# Altium PCB UTAT_data handling_v1_componentMap.PcbDoc (part 2 of 3)
Units mm, origin at the board's own origin, x right, y up, seen from the top; angles counter-clockwise.
Board outline 152.4 x 101.6 mm, 4 copper layers (Top Layer, +3V3, GND, Bottom Layer); 168 components, 207 nets, 753 pads, 464 vias.
Unrouted connection lines stored in the file: 1.
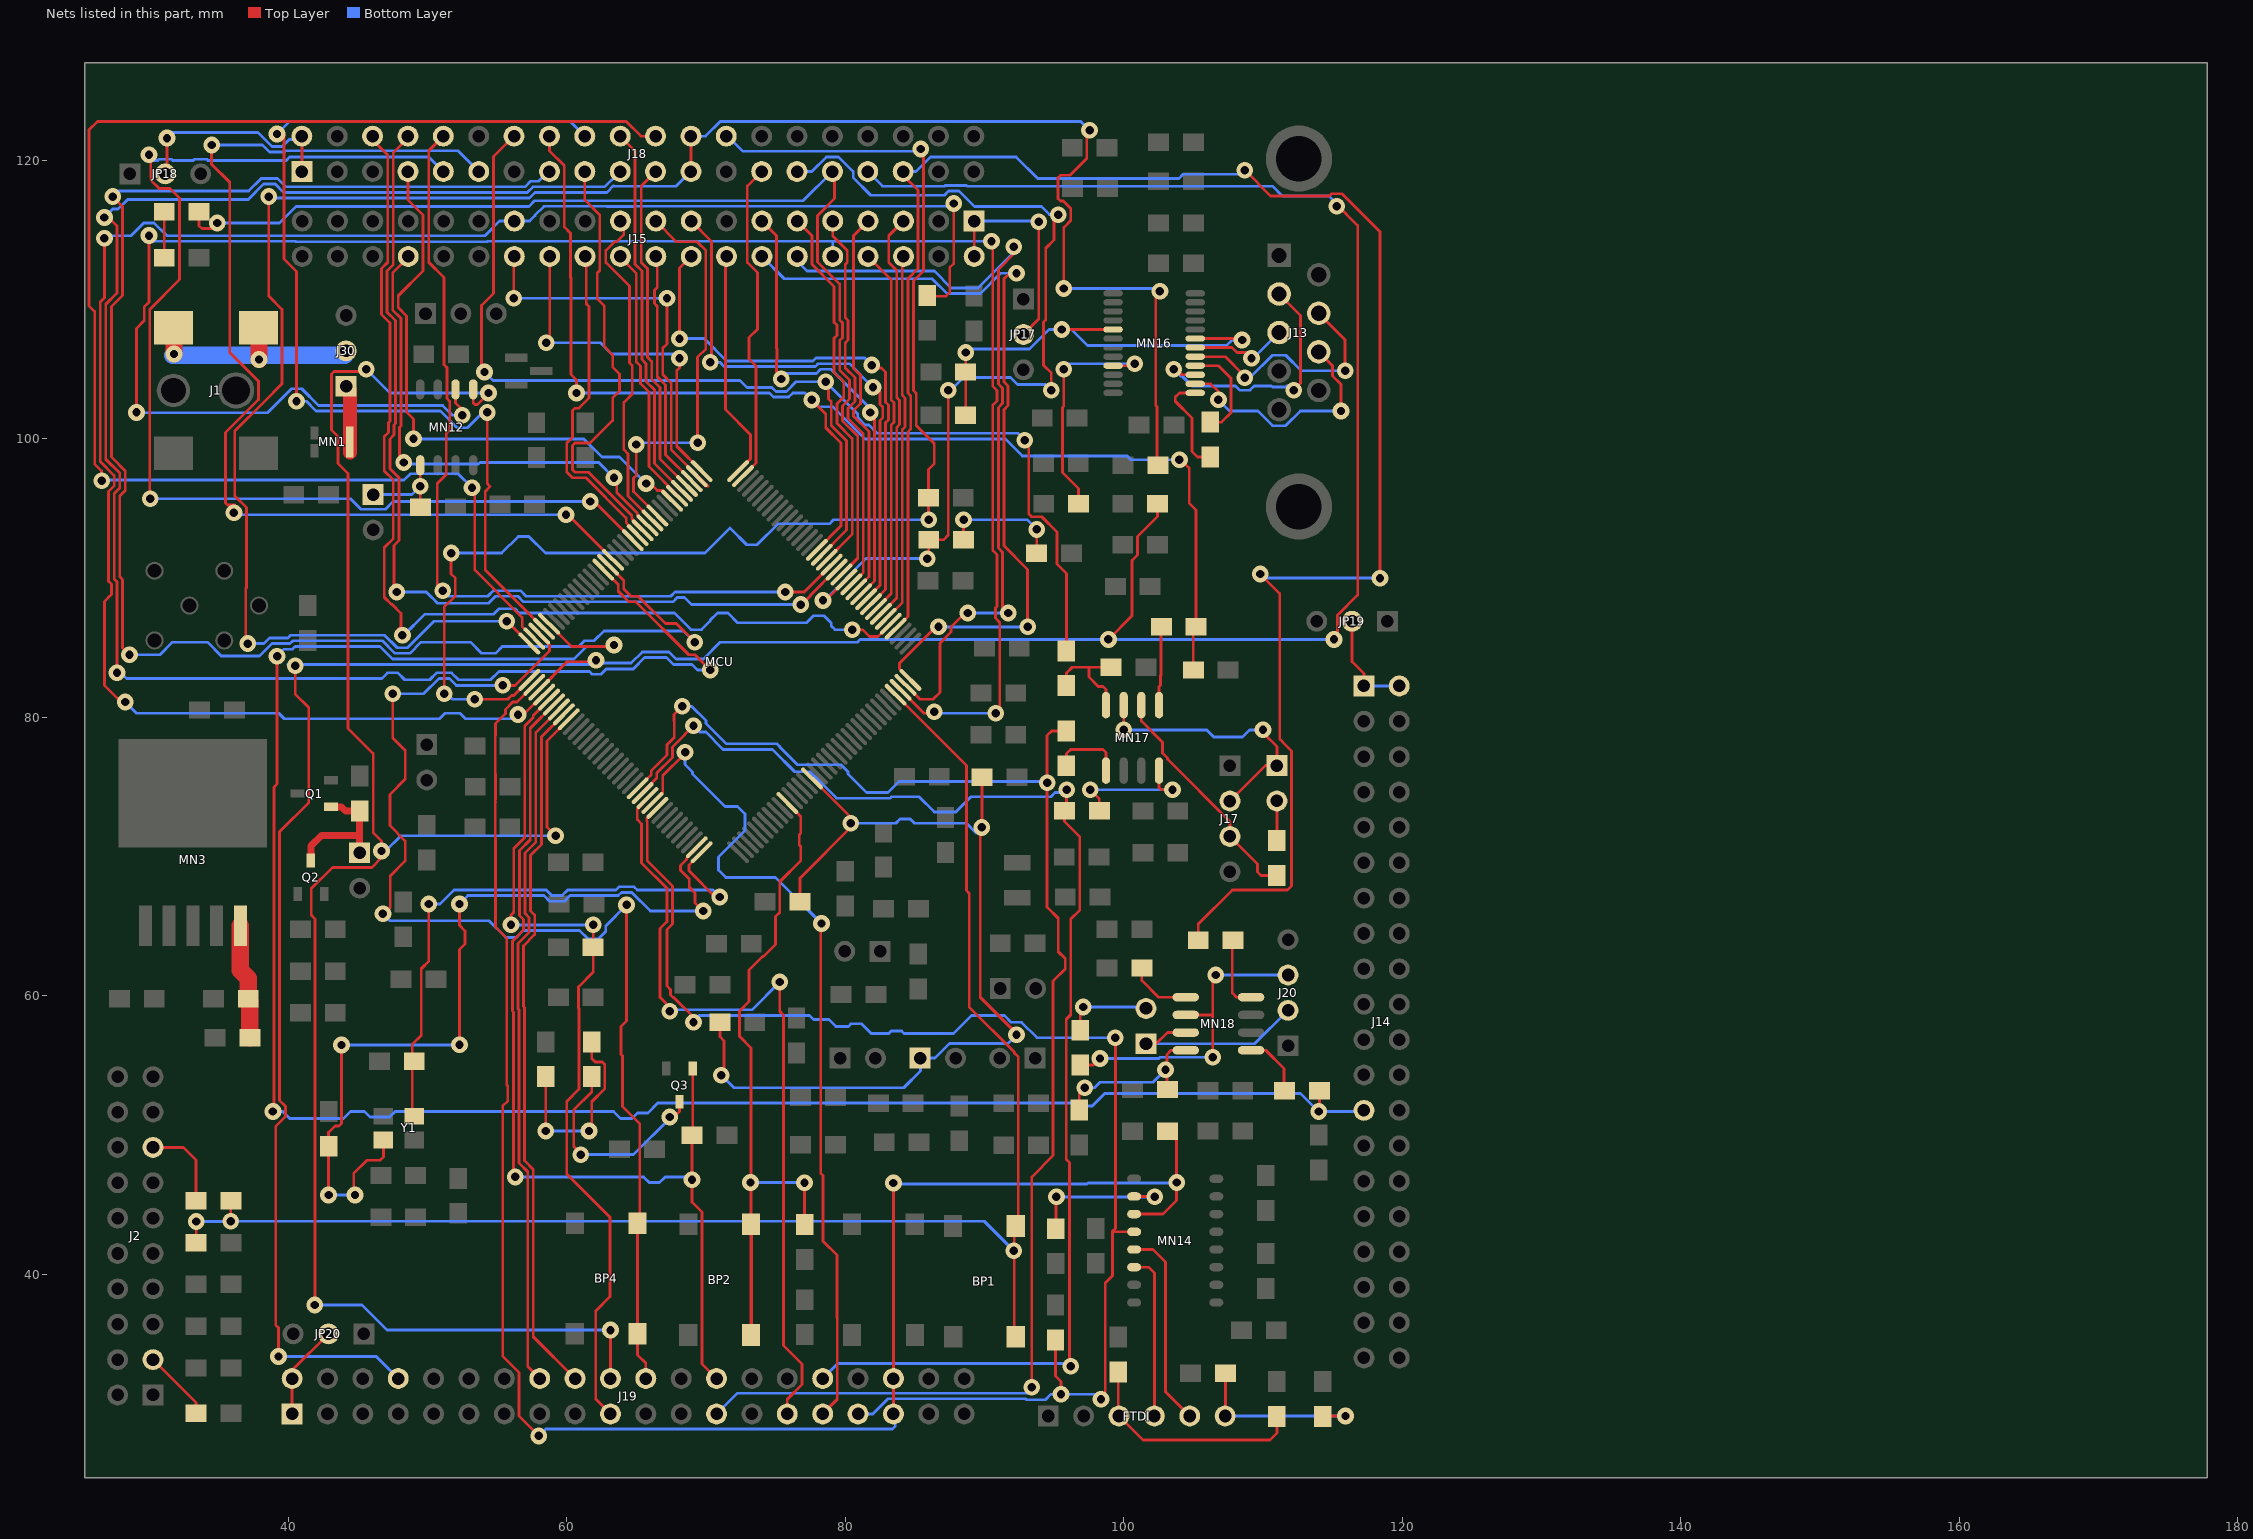
[diagram p4: the nets of this part, all layers, seen from the top]

## Via types
v1: diameter 1.2, hole 0.6, Top Layer to Bottom Layer, 463 vias
v2: diameter 1.27, hole 0.6, Top Layer to Bottom Layer, 1 vias

## Nets (pads, with @x,y where several pads share a name; then routed paths per layer and width w, separated by ;. In a path a pad name is that pad's centre, name@x,y a point inside that pad or via, vN(x,y) a via of type N, cw(c..) or ccw(c..) an arc to the next point about the centre after c; other vN are vias at no path point) (continued)
NetD3_2: D3.2 R11.2 | length 9
  Top Layer w0.2: R11.2@88.5,92.75 v1(88.5,94.2) ; D3.2@93.749,91.774 v1(93.749,93.5) v1@93.749,93.751
  Bottom Layer w0.2: v1(88.5,94.2) 93.049,94.2 v1(93.749,93.5)
NetD4_2: D4.2 R12.2 | length 3.3
  Top Layer w0.2: D4.2@31.1,113 R12.2@31.1,116.3
NetD5_2: D5.2 R13.2 | length 14.7
  Top Layer w0.2: v1(58.5,50.3) D5.2@58.5,54.2 ; v1@61.5,50.2 61.8,50.5 61.8,52.401 62.725,53.326 62.725,55.074 62.549,55.25 62.05,55.25 61.8,55.5 R13.2@61.8,56.7
  Bottom Layer w0.2: v1(58.5,50.3) v1(61.6,50.3)
NetFTDI_3: FTDI.3 R203.1 R204.2 | length 16.7
  Top Layer w0.2: R203.1@99.6,33 99.6,29.891 FTDI.3@99.661,29.83 101.391,28.1 110.5,28.1 111,28.6 R204.2@111,29.8
NetFTDI_4: FTDI.4 MN14.14 | length 11.9
  Top Layer w0.2: MN14.14@100.75,40.52 101.78,40.52 102.201,40.099 FTDI.4@102.201,29.83
NetFTDI_5: FTDI.5 MN14.13 | length 14.4
  Top Layer w0.2: MN14.13@100.75,41.79 102.11,41.79 103,40.9 103,31.571 FTDI.5@104.741,29.83
NetFTDI_6: FTDI.6 R205.1 R206.2 | length 13.4
  Top Layer w0.2: FTDI.6@107.281,29.83 107.3,29.849 R205.1@107.3,32.9 ; R206.2@114.3,29.8 114.33,29.83 v1(115.93,29.83)
  Bottom Layer w0.2: FTDI.6@107.281,29.83 v1(115.93,29.83)
NetJ1_1: J1.1 J30.2 | length 16.6
  Top Layer w1.25: J1.1@31.756,107.98 31.8,107.936 v1(31.8,106.1) ; J1.1@37.856,107.98 38,107.836 37.9,107.736 v1(37.9,105.7)
  Bottom Layer w1.25: v1@31.72,106.02 J30.2@44.056,106.02
NetJ13_2: J13.2 MN16.15 | length 19
  Top Layer w0.2: v1(103.6,105) 103.8,105 104.195,104.605 MN16.15@105.135,104.605 ; J13.2@111.16,110.405 112.7,108.865 112.7,104 v1(112.2,103.5)
  Bottom Layer w0.2: v1(103.6,105) 104.1,104.5 104.2,104.5 104.9,103.8 108.027,103.8 108.327,103.5 109.073,103.5 109.373,103.8 110.606,103.8 110.686,103.72 111.634,103.72 111.714,103.8 111.9,103.8 v1(112.2,103.5)
NetJ13_3: J13.3 MN16.18 | length 7.1
  Top Layer w0.2: MN16.18@105.135,106.555 107.772,106.555 108.127,106.2 108.78,106.2 v1(109.18,105.8)
  Bottom Layer w0.2: v1(109.18,105.8) 109.325,105.8 J13.3@111.16,107.635
NetJ13_7: J13.7 MN16.17 | length 17.5
  Top Layer w0.2: MN16.17@105.135,105.905 107.295,105.905 v1@108.6,104.6 ; J13.7@114,109.02 115.9,107.12 v1(115.9,104.9)
  Bottom Layer w0.2: v1(108.7,104.4) 109.076,104.4 110.686,106.01 111.634,106.01 112.744,104.9 v1(115.9,104.9) v1@116.2,104.9
NetJ13_8: J13.8 MN16.14 | length 18.2
  Top Layer w0.2: MN16.14@105.135,103.955 106.245,103.955 106.8,103.4 v1(106.8,102.8) ; J13.8@114,106.25 115,105.25 115,104.527 115.6,103.927 v1(115.6,102)
  Bottom Layer w0.2: v1(106.8,102.8) 107.6,102 109.636,102 110.686,100.95 111.634,100.95 112.684,102 v1(115.6,102) ; J13.8@114,105.5 J13.8@114,106.25
NetJ14_1: J14.1 J14.2 JP19.2 | length 7.5
  Top Layer w0.2: JP19.2@116.4,86.9 116.4,84 117.25,83.15 J14.1@117.25,82.26
  Bottom Layer w0.2: J14.1@117.25,82.26 J14.2@119.79,82.26
NetJ15_1: J15.1 J15.2 JP17.2 | length 15.8
  Top Layer w0.2: J15.2@89.26,113.1 J15.1@89.26,115.64 ; JP17.2@92.8,107.5 92.8,107.514 93.9,108.614 v1(93.9,115.6)
  Bottom Layer w0.2: J15.1@89.26,115.64 93.86,115.64 v1(93.9,115.6)
NetJ17_2: J17.2 JP22.1 MN17.7 | length 19.9
  Top Layer w0.2: v1(99.996,79.104) MN17.7@99.996,80.88 ; J17.2@107.631,73.99 110.181,76.54 JP22.1@111,76.54 111,77.9 110,78.9 v1(110,79.104)
  Bottom Layer w0.2: v1(99.996,79.104) 105.96,79.104 106.464,78.6 108.536,78.6 109.04,79.104 v1@110.296,79.104
NetJ17_3: J17.3 MN17.6 R128.2 | length 16.9
  Top Layer w0.2: MN17.6@101.266,80.88 101.266,79.734 102.785,78.215 102.785,77.43 103.136,77.079 103.136,77 107.631,72.505 J17.3@107.631,71.45 109.6,69.481 109.6,68.9 109.85,68.65 R128.2@111,68.65
NetJ18_1: J18.1 J18.2 JP18.2 | length 15.7
  Top Layer w0.2: JP18.2@31.171,119.03 31.3,119.159 v1(31.3,121.6) ; J18.1@40.98,119.2 J18.2@40.98,121.74
  Bottom Layer w0.2: v1(31.3,121.6) 31.7,122 37.827,122 38.827,121 39.573,121 40.073,121.5 40.74,121.5 J18.2@40.98,121.74
NetJ19_1: J19.1 J19.2 JP20.2 | length 6.8
  Top Layer w0.2: J19.1@40.281,29.98 J19.2@40.281,32.52 40.281,33.12 JP20.2@42.891,35.73
NetJ20_2: J20.2 JP23.1 MN18.7 | length 14.4
  Top Layer w0.2: JP23.1@101.6,56.56 102.33,56.56 103.135,57.365 MN18.7@104.45,57.365
  Bottom Layer w0.2: JP23.1@101.6,56.56 109.4,56.56 J20.2@111.8,58.96
NetJ20_3: J20.3 MN18.6 R135.2 | length 22.9
  Top Layer w0.2: R135.2@96.881,55.03 97.83,55.03 v1(98.3,55.5) ; MN18.6@104.45,58.635 106.365,58.635 106.4,58.6 ; v1(106.4,55.6) 106.4,58.6 ; v1(106.6,61.5) 106.4,61.3 106.4,58.6
  Bottom Layer w0.2: v1(98.3,55.5) 102.527,55.5 102.627,55.6 v1(106.4,55.6) ; v1(106.6,61.5) J20.3@111.8,61.5
NetJ30_1: J30.1 MN1.1 | length 4.9
  Top Layer w1: J30.1@44.156,103.78 44.426,103.51 MN1.1@44.426,99.03
NetJP3_1: JP3.1 Q1.1 Q2.3 R4.1 | length 10
  Top Layer w0.5: Q2.3@41.631,69.73 41.631,70.78 42.381,71.53 45.131,71.53 ; Q1.1@43.081,73.58 43.831,73.58 44.131,73.28 R4.1@45.131,73.28 45.131,71.53 ; JP3.1@45.131,70.28 45.131,71.53
NetJP11_1: JP11.1 MN12.1 R83.1 | length 6.5
  Top Layer w0.2: MN12.1@49.476,98.105 v1(49.476,96.6) 49.476,95.435 R83.1@49.631,95.28
  Bottom Layer w0.2: JP11.1@46.1,96 48.876,96 v1(49.476,96.6)
NetJP22_2: JP22.2 R128.1 | length 2.8
  Top Layer w0.2: R128.1@111,71.15 JP22.2@111,74
NetJP23_2: JP23.2 R135.1 | length 5.9
  Top Layer w0.2: R135.1@96.881,57.53 96.881,58.881 v1@96.9,58.9
  Bottom Layer w0.2: v1(97.1,59.2) 101.5,59.2 JP23.2@101.6,59.1
NetMN3_5: MN3.5 R3.1 R6.2 | length 8.3
  Top Layer w1.25: MN3.5@36.56,65.03 36.56,61.851 37.131,61.28 R6.2@37.131,59.78 37.25,59.661 R3.1@37.25,57
NetMN14_10: MN14.10 R112.1 | length 10.9
  Top Layer w0.2: R112.1@95.131,43.28 95.131,45.531 v1(95.165,45.565) ; MN14.10@100.75,45.6 102.2,45.6 v1(102.235,45.565)
  Bottom Layer w0.2: v1(95.165,45.565) v1(102.235,45.565)
NetMN16_5: MN16.5 MN16.19 R119.2 RR7-4.2 | length 32.8
  Top Layer w0.2: R119.2@88.65,101.7 RR7-4.2@88.65,104.8 v1(88.65,106.2) ; v1(95.545,107.855) MN16.5@99.235,107.855 ; MN16.19@105.135,107.205 108.395,107.205 v1(108.5,107.1)
  Bottom Layer w0.2: v1(88.65,106.2) 88.9,106.45 93.235,106.45 94.64,107.855 v1(95.545,107.855) 96.252,107.855 97.407,106.7 107.393,106.7 107.793,107.1 v1(108.5,107.1)
NetMN16_9: MN16.9 RR7-1.2 | length 17.1
  Top Layer w0.2: v1(95.7,105) 95.7,102.349 95.6,102.249 95.6,97.589 96.757,96.432 RR7-1.2@96.757,95.33 ; MN16.9@99.235,105.255 100.655,105.255 v1(100.8,105.4)
  Bottom Layer w0.2: v1(95.7,105) 96.1,105.4 v1(100.8,105.4)
NetMN16_13: MN16.13 R124.2 | length 7.4
  Top Layer w0.2: MN16.13@105.135,103.305 104.005,103.305 103.7,103 103.7,102.7 104.9,101.5 104.9,99.1 105.3,98.7 R124.2@106.2,98.7
NetMN16_16: MN16.16 R124.1 | length 7.2
  Top Layer w0.2: MN16.16@105.135,105.255 106.8,105.255 107.7,104.355 107.7,101.873 107.027,101.2 R124.1@106.2,101.2
NetMN17_1: MN17.1 R127.2 | length 5.2
  Top Layer w0.2: R127.2@95.881,76.53 95.9,76.549 95.9,77.4 96.2,77.7 98.5,77.7 98.726,77.474 MN17.1@98.726,76.18
NetMN17_4: MN17.4 R130.2 | length 9.6
  Top Layer w0.2: v1@97.8,74.6 98.25,74.15 R130.2@98.25,73.3 ; MN17.4@102.536,76.18 102.536,74.964 102.7,74.8 v1(103.5,74.8)
  Bottom Layer w0.2: v1(97.6,74.8) v1(103.5,74.8)
NetMN17_5: MN17.5 R129.1 | length 6.1
  Top Layer w0.2: R129.1@102.381,86.78 102.681,86.48 102.681,83.031 102.65,83 102.65,82.314 102.536,82.2 MN17.5@102.536,80.88
NetMN17_8: MN17.8 R126.2 R131.2 | length 7.7
  Top Layer w0.2: R126.2@95.881,82.28 95.9,82.299 95.9,83.2 96.3,83.6 97.5,83.6 ; MN17.8@98.726,80.88 98.726,82 98.5,82.226 98.174,82.226 97.5,82.9 97.5,83.6 ; R131.2@99.131,83.6 R131.2@99.1,83.6 97.5,83.6
NetMN18_1: MN18.1 R133.2 | length 4.5
  Top Layer w0.2: MN18.1@109.15,56.095 110.2,56.095 111.5,54.795 111.5,53.25 R133.2@111.55,53.2
NetMN18_4: MN18.4 R137.2 | length 5.3
  Top Layer w0.2: R137.2@107.85,64 107.8,63.95 107.8,60.2 108.095,59.905 MN18.4@109.15,59.905
NetMN18_5: MN18.5 R136.1 | length 5
  Top Layer w0.2: R136.1@101.3,62.45 101.3,61.1 102.495,59.905 MN18.5@104.45,59.905
NetMN18_8: MN18.8 R134.2 R138.2 | length 13.6
  Top Layer w0.2: R138.2@96.8,51.8 96.8,53 v1(97.2,53.4) ; v1(103,54.7) v1@103.105,54.595 ; MN18.8@104.45,56.095 103.4,56.095 103.105,55.8 v1@103.105,54.595 ; v1@103.105,54.595 103.131,54.569 R134.2@103.131,53.28 103.105,53.306 v1@103.105,54.595
  Bottom Layer w0.2: v1(97.2,53.4) 97.907,53.4 98.307,53.8 102.1,53.8 102.8,54.5 v1@103.1,54.5
NetQ3_3: Q3.3 R13.1 | length 15.5
  Top Layer w0.2: v1(61,48.6) 61,48.7 60.5,49.2 60.5,51.8 61.8,53.1 R13.1@61.8,54.2 ; v1(67.4,51.3) 67.7,51.3 68.1,51.7 Q3.3@68.1,52.4
  Bottom Layer w0.2: v1(61,48.6) 64.8,48.6 67.4,51.2 v1(67.4,51.3)
NRST: BP1.3 BP1.4 MCU.69 R18.1 R24.1 | length 112.4
  Top Layer w0.2: R18.1@33.381,42.28 33.4,42.299 v1(33.4,43.8) ; v1(35.881,43.819) R24.1@35.881,45.28 ; MCU.69@83.622,81.631 88.7,76.553 88.7,67.573 88.9,67.373 88.9,59.206 92.141,55.965 92.141,55.89 92.431,55.6 92.431,43.656 BP1.4@92.25,43.475 ; v1(92.1,41.7) v1@92.144,41.7 ; BP1.3@92.144,35.495 v1@92.144,41.7 ; BP1.4@92.144,43.445 v1@92.144,41.7
  Bottom Layer w0.2: v1(33.4,43.8) 35.862,43.8 v1(35.881,43.819) 89.981,43.819 v1(92.1,41.7)
NRSTB: BP2.3 BP2.4 C22.2 MCU.47 | length 47.8
  Top Layer w0.2: BP2.4@73.259,43.58 BP2.4@73.244,43.595 73.244,56.256 72.4,57.1 72.4,58.9 73.1,59.6 73.1,61.866 74.059,62.825 74.124,62.825 75,63.701 75,65.701 75.3,66.001 75.3,68.199 76.8,69.699 76.8,70.727 76.7,70.827 76.7,71.573 76.8,71.673 76.8,72.897 MCU.47@75.844,73.853 ; C22.2@77.081,43.58 v1(77.081,46.581)
  Top Layer w0.25: BP2.3@73.244,35.645 BP2.4@73.244,43.595
  Bottom Layer w0.2: v1(73.2,46.6) 77.062,46.6 v1(77.081,46.581)
NSRST: J2.15 R24.2 | length 6.4
  Top Layer w0.2: J2.15@30.29,49.12 32.48,49.12 33.381,48.219 R24.2@33.381,45.28
NTRST: J2.3 R22.1 | length 5.1
  Top Layer w0.2: J2.3@30.29,33.88 33.381,30.789 R22.1@33.381,30.03
P1: C36.1 MCU.36 Y1.1 | length 42.4
  Top Layer w0.2: Y1.1@49.034,51.353 48.9,51.487 48.9,56.5 49.55,57.15 49.55,61.949 50.1,62.499 v1(50.1,66.6) ; MCU.36@69.692,70.317 68.774,69.4 68.774,68.988 v1@70.762,67
  Bottom Layer w0.2: v1(50.1,66.6) 50.9,66.6 51.9,67.6 58.527,67.6 58.927,67.2 59.673,67.2 60.073,67.6 63.529,67.6 63.762,67.832 64.838,67.832 65.071,67.6 70.5,67.6 v1(71,67.1)
P2: C33.1 MCU.35 Y1.3 | length 62.3
  Top Layer w0.2: v1(42.9,45.7) C33.1@42.9,49.2 42.9,50.2 43.35,50.65 43.649,50.65 43.825,50.826 v1(43.825,56.475) v1@43.8,56.5 ; v1@44.5,45.8 44.7,46 44.7,47.248 45.652,48.2 46.6,48.2 46.834,48.434 Y1.3@46.834,49.653 ; v1(52.3,66.6) 52.3,65.073 52.7,64.673 52.7,63.738 52.3,63.338 52.3,56.7 v1@52.5,56.5 ; MCU.35@69.338,70.671 69.338,70.6 68.605,69.867 68.605,69.797 68.174,69.366 68.174,69.022 68.8,68.396 68.8,67.8 69.219,67.381 69.219,66.681 v1(69.8,66.1)
  Bottom Layer w0.2: v1(42.9,45.7) v1(44.8,45.7) ; v1(43.825,56.475) v1@52.475,56.475 ; v1(52.3,66.6) 52.9,67.2 58.362,67.2 58.762,66.8 59.838,66.8 60.238,67.2 63.695,67.2 63.927,67.432 64.673,67.432 66.005,66.1 v1(69.8,66.1)
  other v1: 52.3,56.5
P8: C45.1 JP1-4.1 MCU.52 R139.1 R140.1 | length 69
  Top Layer w0.2: R140.1@71,58.1 71,57.073 71.3,56.773 71.3,54.5 v1(71.1,54.3) ; R139.1@76.75,66.75 76.75,68.45 80.6,72.3 80.6,72.632 MCU.52@77.611,75.621 ; v1(89.8,72.1) 89.7,72 89.7,59.9 v1@92.1,57.5 ; v1@89.832,71.832 C45.1@89.832,75.692
  Bottom Layer w0.2: v1(71.1,54.3) 72,53.4 84.2,53.4 85.4,54.6 85.4,55.511 JP1-4.1@85.381,55.53 86.436,55.53 87.486,56.58 91.68,56.58 v1(92.3,57.2) ; v1(80.4,72.4) 83.627,72.4 83.927,72.7 84.673,72.7 84.973,72.4 88.7,72.4 89.4,71.7 v1(89.8,72.1)
PA0: J19.25 MCU.23 R127.1 | length 110.6
  Top Layer w0.2: MCU.23@65.096,74.914 65.118,74.914 66.065,75.861 66.065,76.161 67.2,77.296 67.2,78.038 67.723,78.562 67.723,79.715 67.7,79.739 67.7,80.2 v1(68.3,80.8) ; v1(93.4,31.9) 93.4,47 94.931,48.531 94.931,61.058 95.8,61.927 95.8,62.673 95.3,63.173 95.3,65.573 94.5,66.373 94.5,78.7 94.83,79.03 R127.1@95.881,79.03
  Bottom Layer w0.2: v1(68.3,80.8) 68.973,80.8 70,79.773 70,79.566 71.466,78.1 74.048,78.1 75.1,78.1 75.3,77.9 75.3,77.88 76.58,76.6 79.7,76.6 80.2,76.1 80.2,75.927 81.527,74.6 83.073,74.6 83.873,75.4 v1@94.7,75.4 ; J19.25@70.761,29.98 72.251,31.47 93.57,31.47 93.4,31.64 v1(93.4,31.9)
  other v1: 94.5,75.3
PA1: J19.32 MCU.24 R130.1 | length 97
  Top Layer w0.2: MCU.24@65.449,74.56 65.52,74.56 65.52,74.702 66.465,75.647 66.465,75.995 67.6,77.13 67.6,77.873 68.5,78.773 68.5,78.8 v1(69.1,79.4) ; v1(95.9,74.8) 95.9,73.45 R130.1@95.75,73.3 95.75,72.523 96.85,71.423 96.85,66.175 96.2,65.525 96.2,58.648 95.875,58.323 95.875,48.25 96.1,48.025 v1@96.1,33.4
  Bottom Layer w0.2: v1(69.1,79.4) 69.554,78.945 69.993,78.945 71.2,77.738 71.2,77.73 71.23,77.7 74.773,77.7 76.373,76.1 77.466,76.1 79.366,74.2 83.238,74.2 83.338,74.3 85.3,74.3 86.4,73.2 87.934,73.2 89.034,74.3 94.773,74.3 95.073,74.6 v1@95.9,74.6 ; J19.32@78.381,32.52 79.461,33.6 v1@96.1,33.6
  other v1: 96.2,33.4
PA2: J15.9 MCU.85 | length 28.1
  Top Layer w0.2: J15.9@79.1,115.64 79.1,114.585 80.15,113.535 80.15,112.665 80,112.515 80,108.704 80.2,108.504 80.2,107.096 80,106.896 80,105.104 80.7,104.404 80.7,102.696 80.2,102.196 80.2,101.662 80.205,101.657 80.205,101.457 81.3,100.362 81.3,90.411 MCU.85@80.44,89.551
PA3: J15.7 MCU.84 | length 28.1
  Top Layer w0.2: MCU.84@80.793,89.197 81.7,90.104 81.7,100.527 80.605,101.622 80.605,101.822 80.6,101.827 80.6,102.03 81.1,102.53 81.1,104.57 80.605,105.065 80.605,108.905 80.59,108.92 80.59,114.59 J15.7@81.64,115.64
PA4: J15.13 MCU.83 | length 33.9
  Top Layer w0.2: J15.13@74.02,115.64 75.07,114.59 75.07,106.503 75.1,106.473 75.1,105.727 75.07,105.697 75.07,104.63 v1(75.4,104.3) ; MCU.83@81.147,88.844 82.1,89.797 82.1,101.4 81.6,101.9 v1(81.8,101.9)
  Bottom Layer w0.2: v1(75.4,104.3) 75.8,104.7 77.927,104.7 78.227,105 78.973,105 81.8,102.173 v1(81.8,101.9)
PA5: J19.29 MCU.25 | length 58.1
  Top Layer w0.2: MCU.25@65.803,74.207 65.803,74.136 65.07,73.403 65.07,72.662 65.377,72.355 65.377,69.556 67.2,67.734 67.2,65.331 66.7,64.831 66.7,59.9 67.6,59 67.5,58.9 v1(67.4,58.9) ; v1(75.3,61) 75.3,58.9 75.575,58.625 75.575,34.886 76.891,33.57 76.891,32.085 75.841,31.035 J19.29@75.841,29.98
  Bottom Layer w0.2: v1(67.4,58.9) 67.5,59 73.3,59 v1(75.3,61)
PA6: J15.17 MCU.82 | length 39.2
  Top Layer w0.2: J15.17@68.94,115.64 70.4,114.18 70.4,105.6 v1(70.3,105.5) ; MCU.82@81.501,88.49 82.5,89.49 82.5,101.327 82.7,101.527 82.7,102.273 82.5,102.472 82.5,103.4 v1@82.3,103.6
  Bottom Layer w0.2: v1(70.3,105.5) 71.007,105.5 71.307,105.2 77.862,105.2 78.062,105.4 80.3,105.4 v1(82,103.7)
PA7: J19.31 MCU.26 | length 61.4
  Top Layer w0.2: MCU.26@66.156,73.853 66.889,74.586 66.889,75.811 68.378,77.3 v1@68.4,77.3 ; v1(78.3,65.2) 78.25,65.15 78.25,47.25 78.4,47.1 78.4,46.627 78.406,46.621 78.406,42.384 79.4,41.39 79.4,36.9 79.431,36.869 79.431,31.03 J19.31@78.381,29.98
  Bottom Layer w0.2: v1(68.5,77.5) 68.5,76.622 69.035,76.087 69.035,75.945 71.38,73.6 72.273,73.6 72.8,73.073 72.8,71.873 70.9,69.973 70.9,69.027 71.427,68.5 72.173,68.5 75,68.5 78.1,65.4 v1@78.7,65.4
PA8: J19.33 MCU.27 MN14.12 R200.1 | length 100.2
  Top Layer w0.2: MCU.27@66.51,73.499 65.75,72.74 65.75,72.548 65.777,72.521 65.777,69.722 67.6,67.899 67.6,65.165 67.2,64.765 67.2,60.7 67.455,60.445 67.455,60.065 67.631,59.889 67.684,59.889 69.1,58.473 v1(69.1,58.1) ; R200.1@95.1,35.3 95.1,32.7 95.5,32.3 v1(95.5,31.4) ; v1@98.5,31.1 98.675,31.275 98.675,39.375 99.2,39.9 99.2,43.1 ; v1(99.4,57) 99.4,43.3 99.2,43.1 ; MN14.12@100.75,43.06 99.24,43.06 99.2,43.1
  Bottom Layer w0.2: v1(69.1,58.1) 69.1,58.2 69.5,58.6 77.434,58.6 77.734,58.3 78.827,58.3 79.327,57.8 80.227,57.8 80.427,58 81.173,58 81.873,57.3 83.127,57.3 83.307,57.48 84.053,57.48 84.233,57.3 87.773,57.3 89.073,58.6 91.427,58.6 91.927,58.1 92.673,58.1 93.773,57 v1(99.4,57) ; J19.33@80.921,29.98 81.976,29.98 83.066,31.07 92.957,31.07 93.027,31 94.373,31 94.773,31.4 v1(95.5,31.4) 98,31.4 v1(98.37,31.03)
PA9: J19.35 J19.36 MCU.2 MN14.11 R111.1 | length 129.4
  Top Layer w0.2: 54.863,73.9 54.863,71.356 54.883,71.336 54.883,64.944 55.7,64.127 55.7,53.609 55.771,53.538 55.771,52.462 55.4,52.091 55.4,34.126 56.571,32.955 56.571,29.829 v1(58,28.4) ; 54.883,73.9 54.863,73.92 54.863,74.091 54.883,74.111 54.883,75.941 54.863,75.961 54.863,78.696 54.883,78.716 54.883,79.55 55.6,80.267 55.6,80.573 56.127,81.1 56.433,81.1 MCU.2@57.671,82.338 ; J19.35@83.461,29.98 J19.36@83.461,32.52 v1(83.461,46.561) ; MN14.11@100.75,44.33 102.83,44.33 103.8,45.3 103.8,49.611 R111.1@103.131,50.28
  Bottom Layer w0.2: v1(58,28.4) 58.5,28.9 83.4,28.9 83.6,29.1 83.6,29.841 J19.35@83.461,29.98 ; v1(83.461,46.561) 83.522,46.5 97.373,46.5 97.434,46.561 103.761,46.561 v1(103.8,46.6)
PA10: J18.33 J19.8 MCU.3 R121.1 | length 220.4
  Top Layer w0.2: v1(39.301,34.101) 39.301,36.165 39.1,36.366 39.1,50.627 39.8,51.327 39.8,52.073 39.375,52.498 39.375,71.786 41.481,73.892 41.481,80.692 40.5,81.673 v1(40.5,83.7) ; MCU.3@58.025,81.985 60.04,84 v1@62,84 ; v1(98.9,85.6) 100.6,87.3 100.6,91.278 100.982,91.66 100.982,92.982 102.432,94.432 R121.1@102.432,95.33 ; v1(115.1,85.6) 115.35,85.85 115.35,87.335 116.8,88.785 116.8,115.32 v1@115.26,116.86
  Bottom Layer w0.2: v1(39.301,34.101) 46.32,34.101 J19.8@47.901,32.52 ; v1@39.973,83.8 62.2,83.8 62.1,83.9 v1(62.1,84.1) ; v1@62.3,83.9 64.63,83.9 65.43,84.7 67.338,84.7 67.838,84.2 69.827,84.2 71.027,85.4 75.373,85.4 80.873,85.4 81.073,85.6 87.073,85.6 88.473,85.6 ; J18.33@81.62,119.2 82.67,118.15 87.135,118.15 87.185,118.2 88.718,118.2 88.767,118.15 110.682,118.15 111.382,117.45 114.75,117.45 v1@115.3,116.9 ; 88.473,85.6 v1(98.9,85.6) v1(115.1,85.6)
  other v1: 115.3,116.7
PA11: J15.27 MCU.4 R120.1 | length 137.2
  Top Layer w0.2: v1(26.8,114.4) 26.8,110.131 26.5,109.831 26.5,98.373 27.5,97.373 27.5,96.627 27.1,96.227 27.1,89.773 27.3,89.573 27.3,88.827 27.1,88.627 27.1,88.614 26.8,88.314 26.8,82.3 v1@28.1,81 ; v1(56.5,80.2) 56.9,80.2 58.331,81.631 MCU.4@58.378,81.631 ; R120.1@86.2,110.25 87.25,110.25 87.5,110.5 87.5,112.3 87.8,112.6 v1@87.8,116.9
  Bottom Layer w0.2: v1@26.89,114.59 28.717,114.59 29.627,115.5 30.373,115.5 31.283,114.59 54.135,114.59 55.185,115.64 J15.27@56.24,115.64 57.34,115.64 57.73,116.03 57.73,116.075 58.355,116.7 62.869,116.7 62.879,116.69 64.841,116.69 64.851,116.7 87.3,116.7 87.5,116.9 v1(87.8,116.9) ; v1(28.3,81.1) 29.1,80.3 39.317,80.3 39.717,79.9 50.862,79.9 51.262,80.3 52.338,80.3 52.738,79.9 v1@56.7,79.9
PA12: J19.19 MCU.5 R10.1 | length 61.5
  Top Layer w0.2: v1(56,65.1) 56.007,65.107 56.007,65.814 56.2,66.007 56.2,67.003 56.2,68.996 56.2,70.593 56.983,71.376 56.983,79.388 57.6,80.005 57.6,80.146 MCU.5@58.732,81.278 ; v1(61.9,65.1) R10.1@61.9,63.5 61.9,61.699 60.85,60.649 60.85,59.126 60.875,59.101 60.875,53.301 60,52.426 60,47.2 63.1,44.1 63.1,38.4 62.091,37.391 62.091,31.03 J19.19@63.141,29.98
  Bottom Layer w0.2: v1(56,65.1) 61.6,65.1 61.8,64.9 61.9,65 v1(61.9,65.1)
PA13: J19.26 MCU.6 Q3.1 R14.1 | length 71.8
  Top Layer w0.2: v1(56.3,47) 56.171,47.129 56.171,58.836 56.1,58.907 56.1,63.927 56.9,64.727 56.9,65.473 56.6,65.773 56.6,70.427 57.383,71.21 57.383,79.222 MCU.6@59.085,80.924 ; Q3.1@69,54.8 69,54.85 Q3.1@69.05,54.8 69.05,50.05 R14.1@69,50 v1(69,46.8) 69,45.188 69.709,44.479 69.709,33.572 J19.26@70.761,32.52
  Bottom Layer w0.2: v1(56.3,47) 65.527,47 65.927,46.6 66.673,46.6 67.073,47 68.8,47 v1(69,46.8)
PA14: J19.16 MCU.7 | length 50.2
  Top Layer w0.2: J19.16@58.061,32.52 57.2,33.381 57.2,47.373 56.571,48.002 56.571,59.002 56.5,59.073 56.5,63.762 57.3,64.562 57.3,65.638 57,65.938 57,70.261 57.783,71.044 57.783,78.915 MCU.7@59.439,80.571
PA15: J19.18 MCU.8 | length 50.7
  Top Layer w0.2: MCU.8@59.792,80.217 58.183,78.608 58.183,70.879 57.4,70.096 57.4,66.104 57.7,65.804 57.7,64.396 56.9,63.596 56.9,59.238 56.971,59.167 56.971,48.167 57.6,47.538 57.6,35.521 J19.18@60.601,32.52
PA16: J15.6 MCU.78 | length 26.7
  Top Layer w0.2: MCU.78@82.915,87.076 84.1,88.261 84.1,100.664 84.3,100.864 84.3,102.935 84.1,103.135 84.1,113.02 J15.6@84.18,113.1
PA17: J19.20 MCU.9 MN12.5 | length 134.2
  Top Layer w0.2: v1@41.931,37.431 41.931,65.529 41.656,65.804 41.656,67.713 43.173,69.23 46.005,69.23 46.7,69.925 v1(46.7,70.4) 46.7,71.13 46.1,71.73 46.1,77.407 44.3,79.207 44.3,97.505 43.575,98.23 43.575,100.18 43.106,100.649 43.106,104.654 43.282,104.83 45.43,104.83 v1(45.6,105) ; MN12.5@53.286,103.555 53.286,102.587 53.4,102.473 53.6,102.473 54.381,103.254 v1(54.381,103.3) ; v1(59.2,71.5) 58.583,72.117 58.583,78.301 MCU.9@60.146,79.863 ; J19.20@63.141,32.52 v1(63.141,36)
  Bottom Layer w0.2: v1(41.9,37.8) 45.285,37.8 47.085,36 v1(63.141,36) ; 46.05,104.55 47.3,103.3 v1(54.381,103.3) ; v1(46.7,70.4) 47,70.4 48.1,71.5 v1(59.2,71.5)
PA18: J15.10 MCU.70 MN12.6 | length 143.8
  Top Layer w0.2: v1(29.1,101.9) 29.1,107.927 29.656,108.483 29.656,109.47 30,109.814 v1(30,114.6) ; MN12.6@52.016,103.555 52.016,102.584 52.5,102.1 v1(52.5,101.7) ; MCU.70@83.975,81.985 85.66,80.3 v1@86.2,80.3 ; v1(90.5,114.2) 90.6,114.1 90.6,103.773 90.9,103.473 90.9,102.727 90.6,102.427 90.6,91.992 90.9,91.692 90.9,87.973 90.8,87.873 90.8,87.127 91.1,86.827 91.1,80.6 v1(90.8,80.3)
  Bottom Layer w0.2: v1@29.1,101.88 38.507,101.88 40.227,103.6 40.973,103.6 42.173,102.4 51.093,102.4 51.793,101.7 v1(52.5,101.7) ; v1(30,114.6) 30.4,114.2 31.107,114.2 31.117,114.19 40.525,114.19 40.565,114.15 54.261,114.15 54.311,114.2 79.1,114.2 ; J15.10@79.1,113.1 79.1,114.2 ; v1(86.4,80.4) 86.5,80.3 v1(90.8,80.3) ; v1(90.5,114.2) 79.1,114.2
PA19: J15.12 MCU.71 | length 57.7
  Top Layer w0.2: MCU.71@84.329,82.338 85.367,81.3 86.3,81.3 86.8,81.8 86.8,85.327 87.6,86.127 87.6,86.5 88.6,87.5 v1(88.8,87.5) ; v1(91.7,87.5) 91.3,87.9 91.3,91.858 91,92.158 91,102.262 91.3,102.562 91.3,103.638 91,103.938 91,112.173 92.2,113.373 92.1,113.473 v1(92.1,113.8)
  Bottom Layer w0.2: J15.12@76.56,113.1 76.56,112.74 77.25,112.05 86.4,112.05 87.61,110.84 89.54,110.84 92,113.3 v1@92,113.4 ; v1(88.8,87.5) v1(91.7,87.5)
PA20: J15.14 MCU.72 | length 58.2
  Top Layer w0.2: MCU.72@84.683,82.692 83.9,83.474 83.9,83.889 v1@86.605,86.595 ; v1@91.75,111.85 91.4,111.5 91.4,104.104 91.7,103.804 91.7,102.396 91.4,102.096 91.4,92.324 93.1,90.624 v1(93.1,86.5)
  Bottom Layer w0.2: J15.14@74.02,113.1 75.62,111.5 86.24,111.5 87.3,110.44 89.706,110.44 91.166,111.9 v1(92.3,111.9) ; v1(86.7,86.5) v1(93.1,86.5)
PA21: J18.27 MCU.107 | length 23.4
  Top Layer w0.2: MCU.107@72.662,97.329 73.6,98.267 73.6,105.227 73.1,105.727 73.1,107.273 73.7,107.873 73.7,111.935 72.97,112.665 72.97,118.17 J18.27@74,119.2
PA22: J15.18 MCU.81 | length 39.5
  Top Layer w0.2: v1(68.1,107.2) 68.1,112.26 J15.18@68.94,113.1 ; MCU.81@81.854,88.137 82.9,89.182 82.9,101.161 83.1,101.361 83.1,102.438 82.9,102.638 82.9,104.8 82.6,105.1 82.1,105.1 v1(81.9,105.3)
  Bottom Layer w0.2: v1(68.1,107.2) 69.873,107.2 71.473,105.6 77.696,105.6 77.896,105.8 81.4,105.8 v1(81.9,105.3)
PA23: J15.8 MCU.80 | length 26.6
  Top Layer w0.2: J15.8@81.64,113.1 83.3,111.44 83.3,102.804 83.5,102.604 83.5,101.196 83.3,100.996 83.3,88.875 MCU.80@82.208,87.783
PA24: J15.5 MCU.79 | length 29.5
  Top Layer w0.2: MCU.79@82.561,87.429 83.7,88.568 83.7,100.83 83.9,101.03 83.9,102.77 83.7,102.969 83.7,112.095 83.13,112.665 83.13,114.59 J15.5@84.18,115.64
PA25: J15.16 MCU.108 | length 16.6
  Top Layer w0.2: J15.16@71.48,113.1 71.4,113.02 71.4,102.1 73.2,100.3 73.2,98.574 MCU.108@72.308,97.683
PA26: J15.26 MCU.109 | length 25.3
  Top Layer w0.2: v1(58.527,106.9) 58.78,107.153 J15.26@58.78,113.1 ; v1(68.1,105.8) 68.1,105.1 67.9,104.9 67.9,99.474 MCU.109@69.692,97.683
  Bottom Layer w0.2: v1(58.527,106.9) 62.427,106.9 63.227,106.1 67.8,106.1 v1(68.1,105.8)
PA27: J15.28 MCU.110 | length 30.1
  Top Layer w0.2: v1(56.2,110.1) 56.2,113.06 J15.28@56.24,113.1 ; v1(67.2,110.1) 67.2,106.827 66.9,106.527 66.9,104.627 67.5,104.027 67.5,99.238 70.142,96.596 70,96.596 69.338,97.258 MCU.110@69.338,97.329
  Bottom Layer w0.2: v1(56.2,110.1) v1(67.2,110.1)
PA28: J15.20 MCU.111 | length 17.4
  Top Layer w0.2: J15.20@66.4,113.1 66.5,113 66.5,110.873 66.3,110.673 66.3,109.727 66.5,109.527 66.5,104.461 67.1,103.861 67.1,98.86 MCU.111@68.985,96.975
PA29: J18.21 MCU.112 | length 24.4
  Top Layer w0.2: J18.21@66.38,119.2 65.35,118.17 65.35,112.665 65.8,112.215 65.8,105.862 66.1,105.562 66.1,104.296 66.7,103.695 66.7,98.553 MCU.112@68.631,96.622
PB0: J18.20 MCU.113 | length 27.3
  Top Layer w0.2: J18.20@63.84,121.74 64.91,120.67 64.91,112.539 65.4,112.049 65.4,105.696 65.7,105.396 65.7,104.13 66.3,103.53 66.3,98.246 MCU.113@68.278,96.268
PB1: J15.22 MCU.114 | length 18.9
  Top Layer w0.2: J15.22@63.86,113.1 63.86,113.024 65,111.884 65,105.53 65.3,105.23 65.3,103.964 65.9,103.364 65.9,98.01 67.924,95.985 MCU.114@67.924,95.915
PB2: J18.7 MCU.115 | length 41.3
  Top Layer w0.2: J18.7@48.6,119.2 48.6,117.145 49.67,116.075 49.67,112.05 47.9,110.28 47.9,109.429 48.5,108.829 48.5,101.936 49,101.436 v1(49,100) ; v1@65.8,97 66.506,96.294 66.908,96.294 67.5,95.703 67.5,95.561 MCU.115@67.571,95.561
  Bottom Layer w0.2: v1(49,100) 50.973,100 61.227,100 62.527,98.7 63.8,98.7 v1(65.7,96.8)
PB3: J15.19 MCU.118 | length 29
  Top Layer w0.2: v1(65,99.6) 65,97.373 64.8,97.173 64.8,96.21 MCU.118@66.51,94.501 ; J15.19@66.4,115.64 67.89,114.15 69.375,114.15 69.99,113.535 69.99,106.463 69.4,105.873 v1(69.4,99.727)
  Bottom Layer w0.2: v1@64.827,99.727 v1(69.4,99.727)
PB4: J15.21 MCU.119 | length 24.1
  Top Layer w0.2: J15.21@63.86,115.64 64.1,115.4 64.1,114.678 63.572,114.15 63.425,114.15 62.81,113.535 62.81,112.665 64.5,110.975 64.5,105.464 64.7,105.264 64.7,103.207 64.1,102.607 64.1,99.227 64.4,98.927 64.4,95.903 MCU.119@66.156,94.147
PB5: J15.34 MCU.120 | length 35.6
  Top Layer w0.2: v1(48.3,98.3) 48,98.6 48,100.837 48.1,100.937 48.1,108.664 47.5,109.264 47.5,111.904 48.62,113.024 J15.34@48.62,113.1 ; v1@63.6,97.2 63.6,96.131 65.07,94.661 65.07,94.526 MCU.120@65.803,93.793
  Bottom Layer w0.2: v1(48.3,98.3) 48.4,98.2 53.673,98.2 53.773,98.3 62.3,98.3 v1(63.4,97.2)
PB6: J18.17 MCU.121 | length 31.6
  Top Layer w0.2: J18.17@61.3,119.2 61.3,117.145 62.37,116.075 62.37,112.099 62.2,111.929 62.2,110.038 62.7,109.538 62.7,106.627 63.3,106.027 63.3,105.162 63.8,104.662 63.8,103.438 63.3,102.938 63.3,101.325 61.68,99.705 60.582,99.705 60.406,99.529 60.406,97.781 60.582,97.605 61.561,97.605 64.67,94.496 64.67,94.29 65.449,93.511 MCU.121@65.449,93.44
PB7: J15.24 MCU.122 | length 23.9
  Top Layer w0.2: J15.24@61.32,113.1 61.6,112.82 61.6,112.461 61.4,112.461 61.4,109.707 61.6,109.507 61.6,102.927 60.878,102.205 60.582,102.205 60.406,102.029 60.406,100.281 60.416,100.271 60.416,100.105 60.006,99.695 60.006,97.615 60.416,97.205 61.395,97.205 64.27,94.33 64.27,93.983 65.096,93.157 MCU.122@65.096,93.086
PB8: J18.9 MCU.123 | length 85.3
  Top Layer w0.2: v1(30,120.4) 30.121,120.279 30.121,118.595 30.736,117.98 31.52,117.98 32.2,117.3 32.2,111.448 30.056,109.304 30.056,95.744 v1(30.1,95.7) ; v1(61.7,95.5) 61.975,95.5 MCU.123@64.742,92.733
  Bottom Layer w0.2: v1(30,120.4) 30.4,120 30.656,120 30.736,120.08 31.606,120.08 31.686,120 33.196,120 33.276,120.08 34.146,120.08 34.226,120 39.856,120 40.106,120.25 50.09,120.25 J18.9@51.14,119.2 ; v1(30.1,95.7) 44.476,95.7 45.226,94.95 46.974,94.95 47.524,95.5 v1(61.7,95.5)
PB9: J18.11 MCU.127 | length 77.9
  Top Layer w0.2: v1(34.5,121.1) 34.5,119.726 35.8,118.426 35.8,106.199 37.856,104.143 37.856,102.817 35.5,100.461 35.5,95.4 35.656,95.244 v1@36.156,95.244 ; v1@36.1,94.6 v1(36.1,94.7) ; v1(59.95,94.55) 60.096,94.55 MCU.127@63.328,91.319
  Bottom Layer w0.2: v1(34.5,121.1) 38.161,121.1 38.661,120.6 39.738,120.6 39.829,120.69 52.19,120.69 J18.11@53.68,119.2 ; v1(36.1,94.7) 36.25,94.55 v1(59.95,94.55) v1@60.2,94.8
PB10: J18.15 MCU.128 | length 119.8
  Top Layer w0.2: v1(27.4,117.4) 28.1,116.7 28.1,110.3 27.3,109.5 27.3,98.704 28.3,97.704 28.3,96.296 27.9,95.896 27.9,90.104 28.1,89.904 28.1,85 v1(28.6,84.5) ; MCU.128@62.974,90.965 64.1,89.839 64.1,89.227 64.627,88.7 65.133,88.7 67.1,86.733 67.867,86.733 v1(69.2,85.4)
  Bottom Layer w0.2: v1(27.4,117.4) 27.8,117.8 37.162,117.8 38.062,118.7 39.231,118.7 39.831,118.1 57.003,118.1 57.403,118.5 57.969,118.5 58.669,119.2 J18.15@58.76,119.2 ; v1(28.6,84.5) 30.8,84.5 31.7,85.4 34.193,85.4 35.193,84.4 37.927,84.4 38.827,85.3 40.138,85.3 40.338,85.5 46.761,85.5 47.661,84.6 48.738,84.6 49.539,85.4 53.1,85.4 53.9,84.6 54.873,84.6 55.373,85.1 60.866,85.1 61.266,85.5 61.973,85.5 62.673,86.2 68.4,86.2 v1(69.2,85.4)
PB11: J18.19 MCU.129 | length 128.9
  Top Layer w0.2: v1@26.9,116.1 27.7,115.3 27.7,110.466 26.9,109.666 26.9,98.538 27.9,97.538 27.9,96.462 27.5,96.062 27.5,89.938 27.7,89.738 v1(27.7,83.2) ; MCU.129@62.621,90.611 63.7,89.532 63.7,89.061 64.461,88.3 64.967,88.3 68.767,84.5 69.2,84.5 v1(70.3,83.4)
  Bottom Layer w0.2: v1(26.8,115.9) 27.4,116.5 27.773,116.5 28.473,117.2 37.127,117.2 38.227,118.3 39.066,118.3 39.666,117.7 57.169,117.7 57.569,118.1 62.718,118.1 63.218,118.6 63.24,118.6 J18.19@63.84,119.2 ; v1@27.7,83.5 28.4,82.8 46.727,82.8 47.127,83.2 47.873,83.2 48.373,82.7 50.162,82.7 50.662,83.2 51.738,83.2 52.238,82.7 54.527,82.7 55.127,83.3 61.627,83.3 61.827,83.1 62.461,83.1 62.841,83.48 64.776,83.48 65.596,84.3 67.173,84.3 67.673,83.8 68.993,83.8 69.393,83.4 v1(70.3,83.4)
PB12: J18.29 MCU.86 R11.1 | length 67
  Top Layer w0.2: v1(78.4,88.4) 78.582,88.4 MCU.86@80.086,89.904 ; v1@86,91.6 R11.1@86,92.75 87.05,92.75 87.4,93.1 v1(87.4,103.5) ; v1(94.8,103.5) 94.8,104.734 94.245,105.289 94.245,108.393 94.4,108.548 94.4,113.693 95,114.293 95,115.8 v1(95.3,116.1)
  Bottom Layer w0.2: J18.29@76.54,119.2 77.595,119.2 78.645,120.25 79.515,120.25 80.57,119.195 80.57,118.765 81.835,117.5 87.127,117.5 87.427,117.8 88.173,117.8 89.282,116.69 94.083,116.69 94.673,116.1 v1(95.3,116.1) ; v1(78.4,88.4) 78.5,88.4 81.5,91.4 v1(85.9,91.4) ; v1(87.4,103.5) 87.6,103.5 88.5,104.4 91.875,104.4 92.365,103.91 94.39,103.91 v1(94.8,103.5)
PB13: J18.31 MCU.87 R12.1 | length 79.6
  Top Layer w0.2: R12.1@33.6,116.3 33.6,115.3 33.8,115.1 34.5,115.1 v1(34.9,115.5) ; J18.31@79.231,118.78 79.231,117.256 78,116.025 78,114.766 78.01,114.756 78.01,112.705 79.6,111.115 79.6,108.538 79.8,108.338 79.8,107.262 79.6,107.062 79.6,104.938 80.3,104.239 80.3,102.861 79.8,102.361 79.8,101.496 79.805,101.491 79.805,101.291 80.9,100.196 80.9,91.425 MCU.87@79.733,90.258
  Bottom Layer w0.2: v1(34.9,115.5) 39.375,115.5 40.565,116.69 57.29,116.69 57.7,117.1 76.98,117.1 J18.31@79.08,119.2
PB14: J14.25 MCU.140 R133.1 | length 145.5
  Top Layer w0.2: v1(38.9,51.7) 38.975,51.775 38.975,74.983 39.2,75.208 v1(39.2,84.4) ; MCU.140@58.732,86.722 60.354,85.1 62.8,85.1 63,84.9 v1@63.2,84.9 ; v1@114.05,51.95 R133.1@114.05,53.2
  Bottom Layer w0.2: v1@38.8,51.6 v1(38.9,51.7) 39.607,51.7 40.107,51.2 43.979,51.2 44.479,51.7 45.476,51.7 45.876,51.3 47.284,51.3 47.684,51.7 63.373,51.7 63.873,51.2 64.693,51.2 65.093,51.6 65.838,51.6 66.538,52.3 66.561,52.3 ; v1(39.2,84.4) 39.7,84.9 40.304,84.9 40.504,85.1 46.596,85.1 47.496,84.2 60.531,84.2 61.431,85.1 63.3,85.1 v1(63.4,85.2) ; 66.561,52.3 67.638,52.3 96.462,52.3 96.662,52.1 97.738,52.1 98.638,53 112.7,53 v1(114,51.7) 117.17,51.7 J14.25@117.25,51.78
PB15: J18.35 MCU.76 R137.1 | length 136.7
  Top Layer w0.2: MCU.76@83.622,86.369 84.5,87.247 84.5,100.499 84.7,100.699 84.7,103.101 84.5,103.301 84.5,111.5 85.23,112.23 85.23,117.861 J18.35@84.311,118.78 ; R137.1@105.35,64 105.35,65.15 107.8,67.6 111.749,67.6 112.05,67.901 112.05,77.59 111.4,78.24 111.4,78.264 111.2,78.464 111.2,88.9 v1(109.8,90.3) ; v1(108.7,119.3) 110.55,117.45 114.777,117.45 114.927,117.6 115.673,117.6 118.4,114.873 v1@118.4,90.4
  Bottom Layer w0.2: J18.35@84.16,119.2 85.085,119.2 86.135,120.25 92.277,120.25 93.827,118.7 103.966,118.7 104.266,119 v1@108.9,119 ; v1(109.8,90.3) 110.1,90 v1(118.4,90)
PB16: J18.6 MCU.77 | length 76.8
  Top Layer w0.2: J18.6@46.211,121.32 47.15,120.381 47.15,112.685 46.7,112.235 46.7,108.932 47.3,108.332 47.3,101.269 47.2,101.169 47.2,100.462 46.9,100.162 46.9,97.69 47.55,97.04 47.55,92.859 46.9,92.209 46.9,88.627 47.427,88.1 47.473,88.1 48.1,87.473 48.1,86.527 47.8,86.227 47.8,85.8 47.9,85.9 v1(48.2,85.9) ; v1(80.5,86.3) 81.246,86.3 81.746,85.8 82.346,85.8 MCU.77@83.268,86.722
  Bottom Layer w0.2: v1(48.2,85.9) 48.3,85.9 49.8,87.4 54.727,87.4 55.127,87.8 56.273,87.8 56.573,87.5 65.87,87.5 ; 65.87,87.5 67.727,87.5 68.927,86.3 69.673,86.3 70.3,86.927 70.3,86.973 70.827,87.5 71.573,87.5 72.273,86.8 77.227,86.8 77.727,87.3 78.473,87.3 79,86.773 79,86.572 79.273,86.3 v1(80.5,86.3)
PB17: J18.8 MCU.88 | length 68.5
  Top Layer w0.2: v1(47.8,89) 47.6,88.8 47.6,92.344 47.95,92.694 47.95,97.206 47.3,97.856 47.3,99.996 47.6,100.296 47.6,101.003 47.7,101.103 47.7,108.498 47.1,109.098 47.1,112.069 47.55,112.519 47.55,120.57 J18.8@48.72,121.74 ; v1(76.8,88.1) 76.8,88.032 77.5,88.732 77.5,88.773 79.339,90.611 MCU.88@79.379,90.611
  Bottom Layer w0.2: v1(47.8,89) 49.913,89 50.32,88.593 50.327,88.6 50.727,88.2 54.396,88.2 54.897,88.701 55.229,88.701 55.23,88.7 56.504,88.7 56.904,88.3 65.538,88.3 ; 65.539,88.3 67.638,88.3 67.938,88.6 68.466,88.6 68.966,88.1 69.673,88.1 v1(76.8,88.1)
PB18: J18.10 MCU.89 | length 63.6
  Top Layer w0.2: v1(51.1,89.1) 50.7,89.5 50.7,96.785 51.346,97.431 51.346,100.373 51.6,100.627 51.6,102.697 51.4,102.897 51.4,105.112 51.181,105.331 51.181,111.594 50.09,112.685 50.09,120.69 J18.10@51.14,121.74 ; v1(75.7,89) 77.061,89 MCU.89@79.026,90.965
  Bottom Layer w0.2: v1@51.1,89 51.4,88.7 54.33,88.7 54.731,89.101 55.394,89.101 55.396,89.1 56.67,89.1 57.07,88.7 65.373,88.7 ; 65.373,88.7 67.473,88.7 67.773,89 v1(75.7,89)
PB19: J15.11 MCU.90 | length 27.4
  Top Layer w0.2: J15.11@76.56,115.64 77.61,114.59 77.61,112.539 79.2,110.949 79.2,108.373 79.4,108.173 79.4,107.427 79.2,107.227 79.2,104.773 79.9,104.073 79.9,103.027 79.4,102.527 79.4,101.3 79.405,101.295 79.405,101.125 80.5,100.03 80.5,93.146 MCU.90@78.672,91.319 MCU.90@78.672,91.389
PB20: J18.14 MCU.91 R126.1 | length 89.7
  Top Layer w0.2: v1(54.1,104.8) 54.1,104.62 53.89,104.41 53.89,109.59 54.75,110.45 54.75,120.27 J18.14@56.22,121.74 ; MCU.91@78.319,91.672 80.1,93.454 80.1,99.864 79,100.964 79,102.673 78.8,102.873 78.8,103.5 ; v1@93.187,99.813 93.187,94.601 93.383,94.405 94.117,94.405 95.199,93.323 95.199,91.025 95.881,90.343 R126.1@95.881,84.78
  Bottom Layer w0.2: v1@53.89,104.8 v1(54.1,104.8) 54.7,104.2 72.438,104.2 72.938,103.7 74.727,103.7 75.027,103.4 75.773,103.4 76.473,104.1 v1(78.6,104.1) ; v1@79,103.7 80.9,101.8 80.9,101.527 81.427,101 81.7,101 82.3,100.4 92.4,100.4 v1(92.9,99.9)
PB21: J18.16 MCU.92 R125.1 R129.2 | length 93.3
  Top Layer w0.2: J18.16@58.76,121.74 58.76,120.685 59.83,119.615 59.83,115.205 60.27,114.765 60.27,111.599 60.3,111.57 60.3,104.627 60.7,104.227 v1(60.7,103.3) ; MCU.92@77.965,92.026 79.7,93.761 79.7,99.699 78.6,100.799 78.6,101.8 v1(77.6,102.8) ; v1@104.2,98.4 104.7,97.9 104.7,95.4 105.2,94.9 R129.2@105.2,86.5 ; R129.2@104.881,86.78 105,86.661 R125.1@105,83.75 ; v1(77.6,102.8) 77.4,103 v1(77.6,102.8)
  Bottom Layer w0.2: v1@60.7,103.073 v1(60.7,103.3) 72.773,103.3 74.561,103.3 74.861,103 75.938,103 76.238,103.3 77.1,103.3 78.1,102.3 79.134,102.3 81.434,100 91.5,100 92.719,98.781 100.254,98.781 100.535,98.5 v1(104,98.5)
PB22: J18.18 MCU.141 | length 74.4
  Top Layer w0.2: v1@39.7,121.9 39.7,112.915 40.6,112.015 v1@40.6,103.2 ; v1(54.3,101.9) 54.3,96.775 54.5,96.575 54.15,96.225 54.15,90.597 MCU.141@58.378,86.369
  Bottom Layer w0.2: v1(39.2,121.9) 40.09,122.79 60.25,122.79 J18.18@61.3,121.74 ; v1(40.6,102.7) 41.307,102.7 42.007,102 50.927,102 52.127,100.8 52.873,100.8 53.973,101.9 v1(54.3,101.9)
PB23: BP4.3 BP4.4 J19.22 MCU.142 | length 87.2
  Top Layer w0.2: v1(46.8,65.9) 47.325,66.325 47.325,68.621 48.4,69.696 48.4,71.127 47.3,72.227 47.3,74.461 48.4,75.561 48.4,77.638 47.5,78.538 v1(47.5,81.7) ; v1(55.4,82.3) 56.289,82.3 58.757,84.768 58.757,85.212 58.025,85.945 MCU.142@58.025,86.015 ; v1(64.3,66.532) 64.3,58.204 63.9,57.804 63.9,55.796 64,55.696 64,52.062 65.25,50.812 65.25,43.849 BP4.4@65.081,43.68 BP4.3@65.081,35.73 65.081,34.219 65.681,33.619 J19.22@65.681,32.52
  Bottom Layer w0.2: v1(46.8,65.9) 47.3,65.4 54.427,65.4 55.627,64.2 56.373,64.2 56.873,64.7 60.927,64.7 61.527,64.1 62.273,64.1 62.8,64.627 62.8,65.032 v1(64.3,66.532) ; v1(47.5,81.7) 49.727,81.7 50.827,82.8 51.573,82.8 52.073,82.3 v1(55.4,82.3)
PB24: J18.22 MCU.143 | length 107.1
  Top Layer w0.2: v1@26.6,96.6 26.6,97.707 26.1,98.207 26.1,109.145 25.7,109.545 25.7,122.2 26.3,122.8 40.535,122.8 40.545,122.79 64.275,122.79 65.325,121.74 J18.22@66.38,121.74 ; v1@53.4,96.4 53.4,90.573 56.8,87.173 56.8,86.533 MCU.143@57.671,85.662
  Bottom Layer w0.2: v1(26.6,97) 26.65,97.05 48.323,97.05 48.773,97.5 52.2,97.5 v1(53.2,96.5)
PB25: J18.23 J18.24 MCU.144 R123.1 | length 153.2
  Top Layer w0.2: v1(37.1,85.3) 36.956,85.444 36.956,89.256 37,89.3 37,95.073 36.156,95.917 36.156,100.552 38.256,102.652 38.256,102.656 39.556,103.956 39.556,109.304 38.6,110.26 v1(38.6,117.4) ; v1@55.9,87.1 55.9,86.726 MCU.144@57.317,85.308 ; J18.23@68.92,119.2 J18.24@68.92,121.74 ; v1(95.7,110.8) 95.7,115.173 96.2,115.673 96.2,116.534 95.659,117.075 95.457,117.075 95.281,117.251 95.281,118.749 95.457,118.925 96.124,118.925 97.35,120.151 97.35,121.649 97.174,121.825 97.174,122.074 v1@97.6,122.5 ; R123.1@102.381,98.23 102.381,102.319 102.3,102.4 102.3,110.3 v1(102.6,110.6)
  Bottom Layer w0.2: v1(37.1,85.3) 38.262,85.3 38.662,85.7 39.973,85.7 40.173,85.9 46.927,85.9 47.827,85 48.573,85 50.473,86.9 v1(55.7,86.9) ; v1(38.6,117.4) 38.7,117.3 57.334,117.3 57.734,117.7 62.884,117.7 63.369,118.186 63.405,118.15 67.87,118.15 J18.23@68.92,119.2 ; J18.24@68.92,121.74 69.975,121.74 71.025,122.79 96.916,122.79 v1(97.55,122.156) ; v1(95.7,110.8) 102.4,110.8 v1(102.6,110.6)
PB26: J18.26 MCU.1 R122.1 | length 96.7
  Top Layer w0.2: v1(51.2,81.7) 51.2,87.927 52,88.727 52,90 51.7,90.3 v1(51.7,91.8) ; v1(53.4,81.3) 55.762,81.3 56.036,81.574 56.2,81.574 MCU.1@57.317,82.692 ; v1@85.63,120.818 85.63,112.064 84.9,111.334 84.9,103.467 85.1,103.267 85.1,100.951 86.4,99.651 86.4,98.227 85.978,97.805 R122.1@85.978,95.776 v1@85.978,94.422
  Bottom Layer w0.2: v1(51.2,81.7) 51.4,81.7 51.8,81.3 v1(53.4,81.3) ; v1(51.7,91.8) 55.327,91.8 56.527,93 57.273,93 58.473,91.8 69.927,91.8 71.727,93.6 72.927,92.4 73.673,92.4 75.173,93.9 78.873,93.9 79.173,94.2 v1(86,94.2) ; J18.26@71.46,121.74 71.56,121.74 72.65,120.65 85.262,120.65 v1(85.43,120.818)